# Altium PCB CMTestBoard.PcbDoc (part 1 of 2)
Units mil, origin at the board's own origin, x right, y up, seen from the top; angles counter-clockwise.
Board outline 3790 x 3730 mil, 4 copper layers (Top Layer, Layer 1, Layer 2, Bottom Layer), stack 22.4 mil thick; 114 components, 108 nets, 634 pads, 218 vias.
Unrouted connection lines stored in the file: 45.
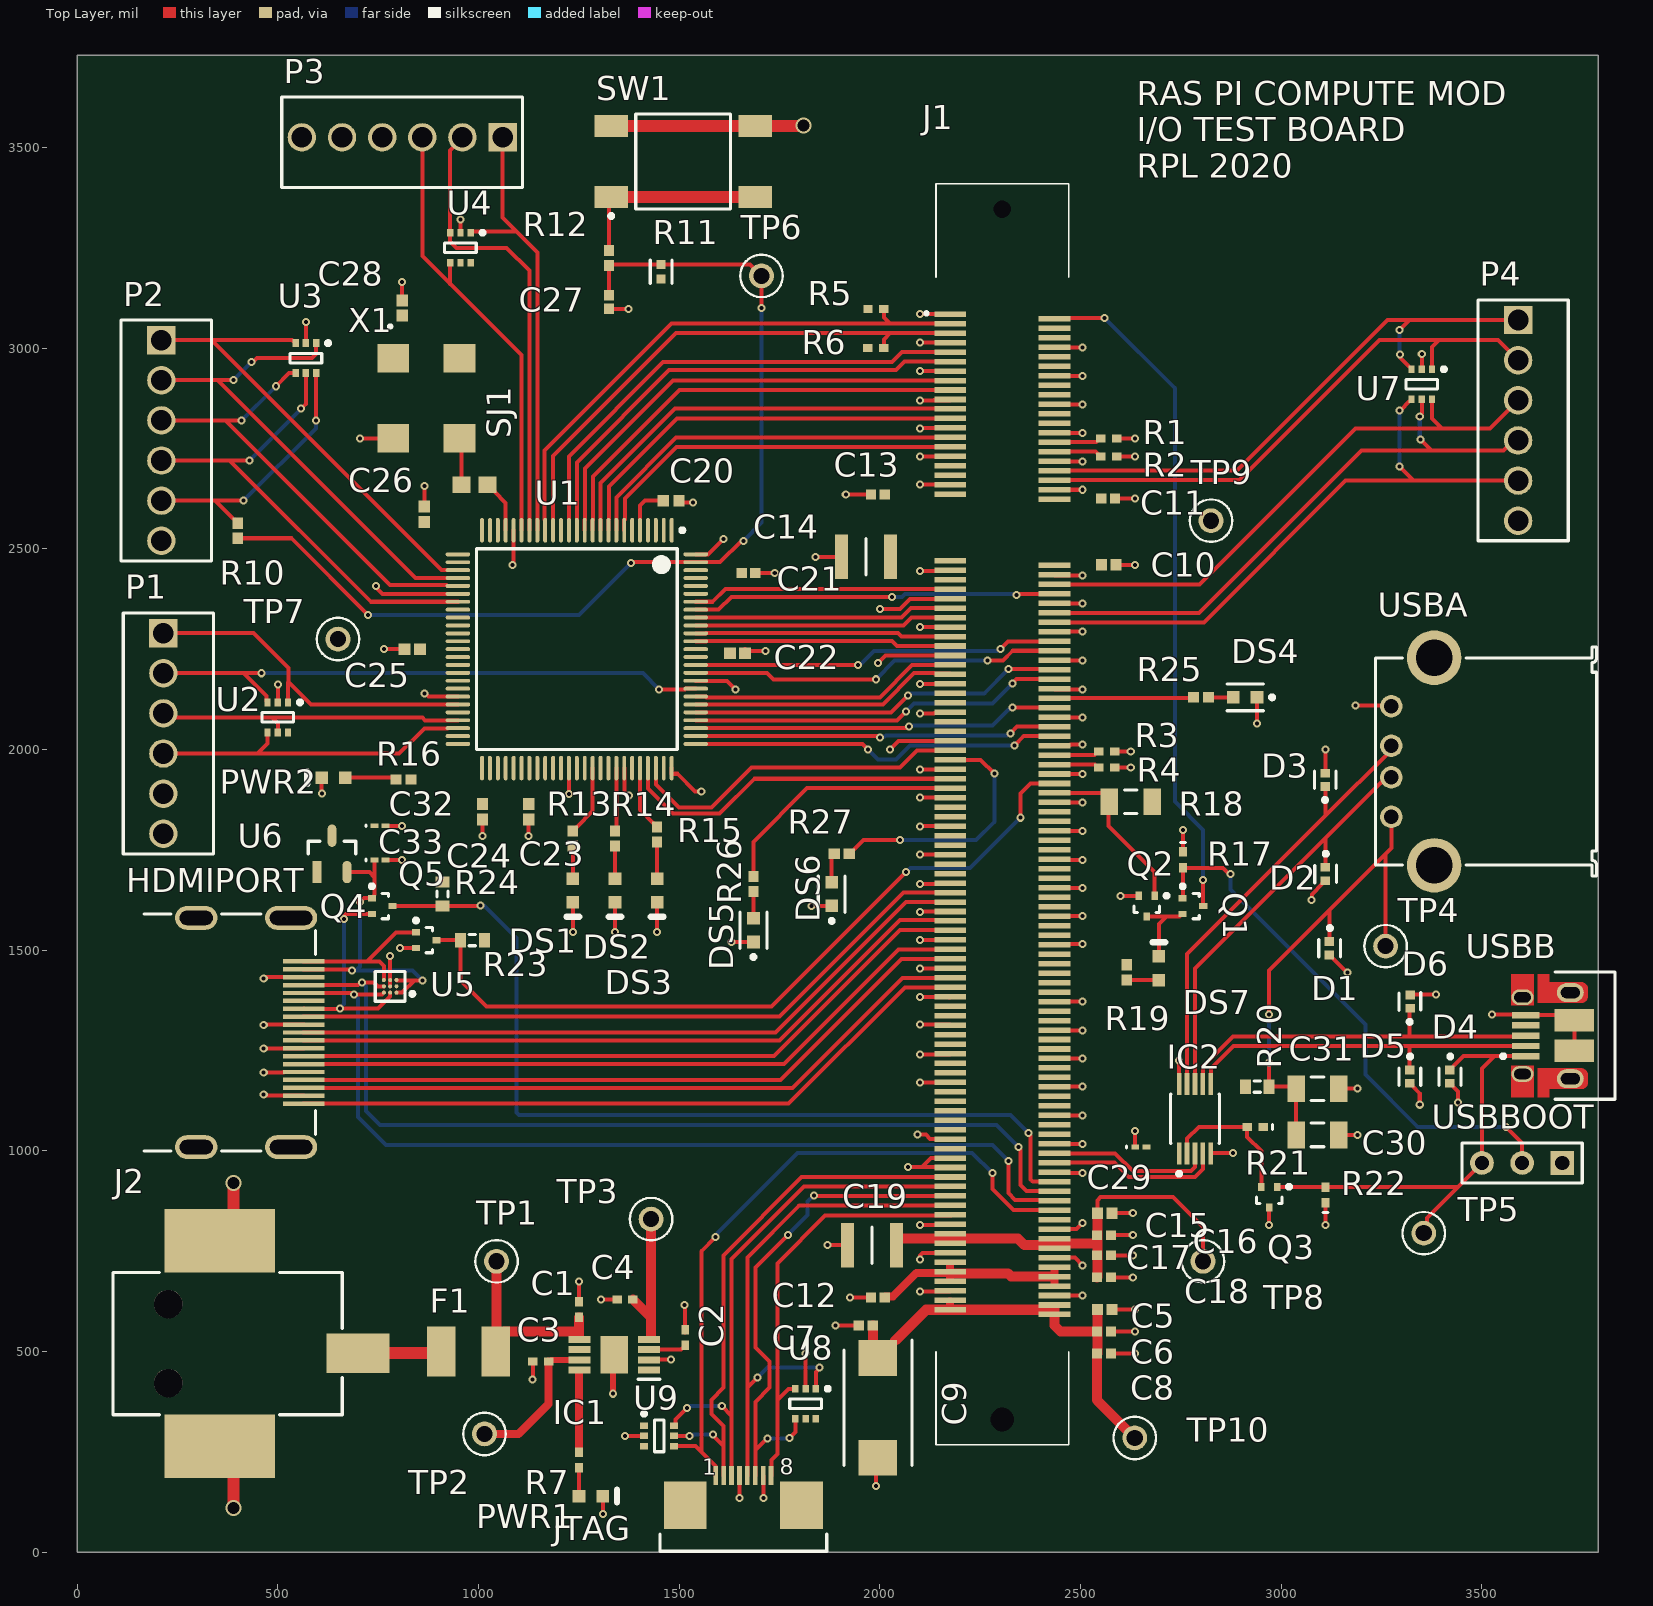
[diagram p0: Top Layer view]
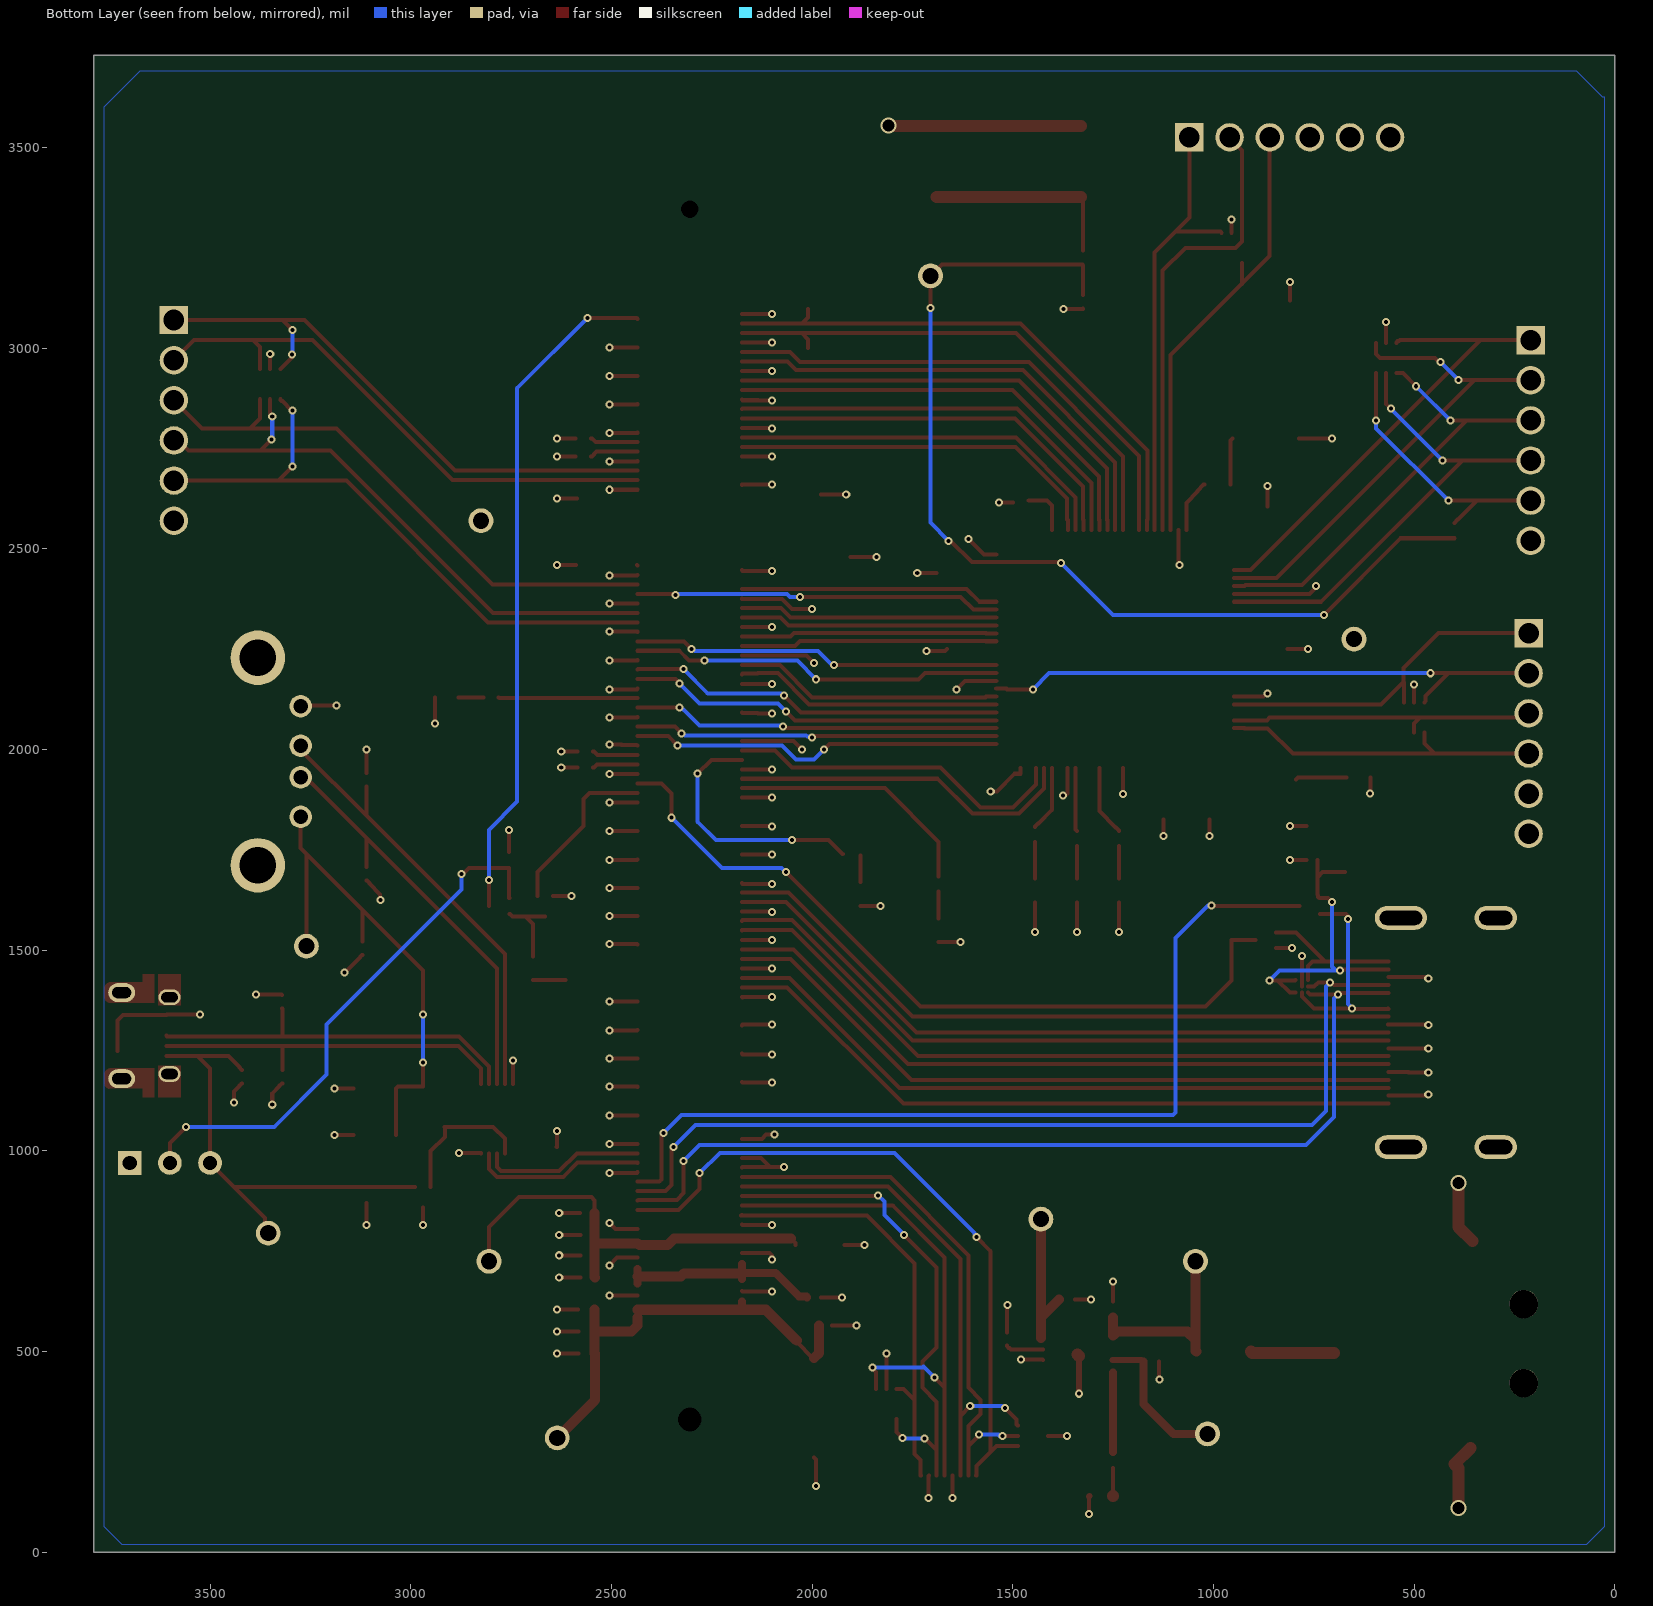
[diagram p1: Bottom Layer view, seen from below]

## Layer stack, top to bottom
Top Solder: solder mask 0.4, Solder Resist, Dk 3.5
Top Layer: signal copper 1.4
Dielectric 2: prepreg 2.8, PP-006, Dk 4.1
Layer 1: signal copper 0.7
Dielectric 1: dielectric 12.6, FR-4, Dk 4.8
Layer 2: signal copper 0.7
Dielectric 3: prepreg 2.8, PP-006, Dk 4.1
Bottom Layer: signal copper 1.4
Bottom Solder: solder mask 0.4, Solder Resist, Dk 3.5

## Board outline
0,0 3790,0 3790,3730 0,3730

## Design rules (kind name [scope] priority, off if disabled: settings)
Clearance [All] p1: gap=10 ignorepadtopadclearanceinfootprint=FALSE except(0: Arc-Hole Track-Hole SMDPad-Hole THPad-Hole Via-Hole Fill-Hole Poly-Hole Region-Hole Text-Hole; 1: SMDPad-SMDPad; 5: Arc-Arc Arc-Track Arc-SMDPad Arc-Via Track-Track Track-SMDPad Track-Via SMDPad-Via)
PolygonConnect [All] p1: connectstyle=Relief reliefconductorwidth=10 reliefentries=4 polygonreliefangle="90 Angle" airgapwidth=10
RoutingVias [All] p1: holewidth=10 width=20 viastyle="Through Hole" minholewidth=5 minwidth=20 maxholewidth=28 maxwidth=50
SolderMaskExpansion [All] p1: expansion=4 istentingtop=FALSE
Width [All] p1: maxlimit=80 minlimit=10 preferedwidth=10
30 further rules are at their usual default settings.

## Classes and differential pairs
net class TC[1..5]: TC1 TC2 TC3 TC4 TC5
component class U_Peripherals: C29 C30 C31 C32 C33 D1 D2 D3 D4 D5 D6 DS7 HDMIPORT IC2 JTAG Q1 Q2 Q3 Q4 Q5 R17 R18 R19 R20 R21 R22 R23 R24 TP4 TP5 U5 U6 USBA USBB USBBOOT
net class TOG[1..10]: TOG1 TOG2 TOG3 TOG4 TOG5 TOG6 TOG7 TOG8 TOG9 TOG10
component class U_XC95144XL: C20 C21 C22 C23 C24 C25 C26 C27 C28 DS1 DS2 DS3 P1 P2 P3 PWR2 R10 R11 R12 R13 R14 R15 R16 SJ1 SW1 TP6 TP7 U1 U2 U3 U4 X1
component class U_CMPower: C1 C2 C3 C4 C5 C6 C7 C8 C9 C10 C11 C12 C13 C14 C15 C16 C17 C18 C19 F1 IC1 J2 TP1 TP2 TP3
component class U_200PinConnector: DS4 DS5 DS6 J1 P4 PWR1 R1 R2 R3 R4 R5 R6 R7 R25 R26 R27 TP8 TP9 TP10 U7 U8 U9

## Components (designator, comment, footprint, x,y, rotation, side; value= is the part's Value field where it differs from the comment)
C1 "C1005X5R0J225M050BC" 0402 1250,605 r270 top value=2.2uF
C2 "VJ0402Y104KXXCW1BC" 0402 1515,535 r270 top value=100nF
C3 "C1005X5R0J225M050BC" 0402 1155,475 r0 top value=2.2uF
C4 "C1005X5R0J225M050BC" 0402 1365,630 r0 top value=2.2uF
C5 "C0402C150J4GACTU" CAPC1005X90N 2560,605 r180 top value=15pF
C6 "C0402C560K5RACTU" CAPC1005X55N 2558.43,550 r0 top value=56pF
C7 "C0402C103K8RACTU" CAPC1005X55N 1965,565 r180 top value=10nF
C8 "C0402C104Z4VAC7867" CAPC1005X55N 2558.43,495 r0 top value=100nF
C9 "6TPC330MA" CAPPM7343X200N 1995,360 r270 top value=330uF
C10 "C0402C150J4GACTU" CAPC1005X90N 2570.2,2460 r180 top value=15pF
C11 "C0402C560K5RACTU" CAPC1005X55N 2568.62,2625 r0 top value=56pF
C12 "C0402C103K8RACTU" CAPC1005X55N 1995,635 r180 top value=10nF
C13 "C0402C104Z4VAC7867" CAPC1005X55N 1995,2635 r180 top value=100nF
C14 "GRM32ER60G337ME05L" CAPC3225X280N 1965,2480 r180 top value=330uF
C15 "C0402C150J4GACTU" CAPC1005X90N 2560,845 r180 top value=15pF
C16 "C0402C560K5RACTU" CAPC1005X55N 2558.43,790 r0 top value=56pF
C17 "C0402C103K8RACTU" CAPC1005X55N 2558.43,740 r0 top value=10nF
C18 "C0402C104Z4VAC7867" CAPC1005X55N 2558.43,685 r0 top value=100nF
C19 "GRM32ER60G337ME05L" CAPC3225X280N 1980,765 r180 top value=330uF
C20 "2.2uF 0402" CAPC0402(1005)60_M 1480,2620 r180 top value=2.2uF
C21 "0.01uF 0402" CAPC1005X55X30NL05T10 1673.07,2440 r180 top
C22 "0.1 uF 0402" CAPC1005X55X30ML05T10 1645,2240 r180 top
C23 "0.1 uF 0402" CAPC1005X55X30ML05T10 1125,1845 r90 top
C24 "0.1 uF 0402" CAPC1005X55X30ML05T10 1010,1845 r90 top
C25 "0.1 uF 0402" CAPC1005X55X30ML05T10 835,2250 r0 top
C26 "0.1 uF 0402" CAPC1005X55X30ML05T10 865,2586.1 r270 top
C27 "0.01uF 0402" CAPC1005X55X30NL05T10 1325,3115 r90 top
C28 "0.1 uF 0402" CAPC1005X55X30ML05T10 810,3100 r270 top
C29 "100nF" 0603 2650,1010 r0 top
C30 "47uF" C1206 3090,1040 r180 top
C31 "47uF" C1206 3090,1155 r180 top
C32 "100nF" 0603 755,1810 r0 top
C33 "100nF" 0603 755,1725 r0 top
D1 "SP3030-01ETG" FP-SP3030-MFG 3120,1505 r270 top value=0.5pF
D2 "SP3030-01ETG" FP-SP3030-MFG 3110,1690 r270 top value=0.5pF
D3 "SP3030-01ETG" FP-SP3030-MFG 3110,1924.49 r90 top value=0.5pF
D4 "SP3030-01ETG" FP-SP3030-MFG 3420,1185 r270 top value=0.5pF
D5 "SP3030-01ETG" FP-SP3030-MFG 3320,1185 r270 top value=0.5pF
D6 "SP3030-01ETG" FP-SP3030-MFG 3320.87,1371.75 r90 top value=0.5pF
DS1 "HSMG-C190" AVAG-HSMX-C190_V 1235,1648.7 r270 top
DS2 "HSMG-C190" AVAG-HSMX-C190_V 1340,1648.7 r270 top
DS3 "HSMG-C190" AVAG-HSMX-C190_V 1445,1648.7 r270 top
DS4 "LTST-C190KFKT" FP-LTST-C190KFKT-MFG 2910,2130 r180 top
DS5 "LTST-C190KFKT" FP-LTST-C190KFKT-MFG 1685,1550 r90 top
DS6 "LTST-C190KFKT" FP-LTST-C190KFKT-MFG 1880,1640 r90 top
DS7 "HSMY-C190" AVAG-HSMX-C190_V 2695,1455 r90 top
F1 "1812L150ZR" LFUS-FUSE1812-71_V 975,500 r0 top
HDMIPORT "685119134923" 685119134923 355,1295 r270 top
IC1 "MIC5357-SGYMME" SOP65P490X104-9N 1338.39,492.2 r180 top
IC2 "FSUSB42MUX" FP-846AP-MFG 2785,1080 r90 top
J1 "2040910-1" 20409101 2305.08,1838.54 r270 top
J2 "694106105102" 694106105102 375,520 r270 top
JTAG "68710814522" 68710814522 1660,90 r0 top
P1 "640456-6" TECO-640456-6_V 215,2290 r270 top
P2 "640456-6" TECO-640456-6_V 210,3020 r270 top
P3 "640456-6" TECO-640456-6_V 1060,3525 r180 top
P4 "640456-6" TECO-640456-6_V 3590,3070 r270 top
PWR1 "HSMY-C190" AVAG-HSMX-C190_V 1280,140 r0 top
PWR2 "HSMG-C190" AVAG-HSMX-C190_V 638.7,1930 r180 top
Q1 "DMG1012T-7" DIOD-SOT523-3_V 2780,1610 r0 top
Q2 "DMG1012T-7" DIOD-SOT523-3_V 2665,1610 r270 top
Q3 "DMG1012T-7" DIOD-SOT523-3_V 2970,885 r270 top
Q4 "DMG1012T-7" DIOD-SOT523-3_V 760,1610 r0 top
Q5 "DMG1012T-7" DIOD-SOT523-3_V 870,1525 r0 top
R1 "CRGP0402F100K" 0402 2570,2775 r0 top value=100k
R2 "CRGP0402F100K" 0402 2570,2730 r0 top value=100k
R3 "CRGP0402F100K" 0402 2565,1995 r0 top value=100k
R4 "CRGP0402F100K" 0402 2565,1955 r0 top value=100k
R5 "0402WGF1801TCE" 0402 1990.07,3097.06 r0 top value=1.8K
R6 "0402WGF1801TCE" 0402 1990,3000 r0 top value=1.8K
R7 "CRG0402J1K0" 0402 1250,230 r270 top value=1K
R10 "0402" RESC1005X40X25ML05T10 400,2545 r270 top
R11 "10k 0402" FP-CRCW0402-e3-IPC_B 1455,3190 r270 top
R12 "0402" RESC1005X40X25ML05T10 1325,3225 r270 top
R13 "0402" RESC1005X40X25ML05T10 1235,1778.7 r90 top
R14 "0402" RESC1005X40X25ML05T10 1340,1778.7 r90 top
R15 "0402" RESC1005X40X25ML05T10 1445,1788.7 r90 top
R16 "0402" RESC1005X40X25ML05T10 813.7,1925 r0 top
R17 "47K" 0402-A 2755,1725 r270 top
R18 "100K" C1206 2625,1870 r0 top
R19 "0402" RESC1005X40X25ML05T10 2615,1445 r90 top
R20 "0R" J1-0603 2940,1160 r180 top
R21 "47k" 0402-A 2935,1060 r180 top
R22 "47k" 0402-A 3110,890 r90 top
R23 "1K" J1-0603 985,1525 r0 top
R24 "1K" J1-0603 910,1640 r90 top
R25 "0402" RESC1005X40X25ML05T10 2800,2130 r180 top
R26 "0402" RESC1005X40X25ML05T10 1685,1665 r90 top
R27 "0402" RESC1005X40X25ML05T10 1905,1740 r0 top
SJ1 "0R 0603" RESC1609X55X30ML10T20 990,2660 r0 top
SW1 "4-1437565-1" TECO-4-1437565-1_V 1510,3465 r90 top
TP1 "5004" FP-5004-MFG 1045,725 r0 top
TP2 "5004" FP-5004-MFG 1015,295 r0 top
TP3 "5004" FP-5004-MFG 1430,830 r0 top
TP4 "5004" FP-5004-MFG 3260,1510 r0 top
TP5 "5004" FP-5004-MFG 3355,795 r0 top
TP6 "5004" FP-5004-MFG 1705,3180 r0 top
TP7 "5004" FP-5004-MFG 650,2275 r0 top
TP8 "5004" FP-5004-MFG 2805,725 r0 top
TP9 "5004" FP-5004-MFG 2825,2570 r0 top
TP10 "5004" FP-5004-MFG 2635,285 r90 top
U1 "XC95144XL-10TQG100C" TQG100_L 1245,2250 r270 top
U2 "SMF05CT1G" ONSC-SC70-6-419B-02_W_V 500,2080 r270 top
U3 "SMF05CT1G" ONSC-SC70-6-419B-02_W_V 570,2975 r270 top
U4 "SMF05CT1G" ONSC-SC70-6-419B-02_W_V 955,3250 r270 top
U5 "ESD5384NCTBG" FP-567CX-01-MFG 780,1410 r180 top
U6 "AP2331W-7" FP-SC59-IPC_B 635,1740 r90 top
U7 "SMF05CT1G" ONSC-SC70-6-419B-02_W_V 3350,2910 r270 top
U8 "SMF05CT1G" ONSC-SC70-6-419B-02_W_V 1815,370 r270 top
U9 "SMF05CT1G" ONSC-SC70-6-419B-02_W_V 1450,290 r0 top
USBA "61400416021" 61400416021 3510,1970 r90 top
USBB "10103594-0001LF" FCI-10103594-0001LF_V 3665.43,1287.11 r90 top
USBBOOT "Header 3" HDR1X3 3700,970 r180 top
X1 "OCETDLJTNF-50MHZ" TXC-L500W700H130-4_V 870,2875 r270 top

## Footprints (in the part's own frame and the unit in brackets; to place one, negate y for a bottom-side part, rotate by r counter-clockwise, add the part's x,y. Pads: shape width x height; smd on the part's side, far side on the other; paste and mask are expansions set on the pad)
0402 [mm] "Chip Capacitor, Body 1.0x0.5mm, IPC High Density"
  rect 0.6x0.5 smd: 1(-0.5,0) 2(0.5,0)
  body extent -0.55,-0.3 0.55,0.3, height 1.3
0402-A [mm] "Chip Inductor, Body 1.0x0.5mm, IPC High Density"
  rect 0.6x0.5 smd: 1(-0.5,0) 2(0.5,0)
  silkscreen extent -1.1,-0.15 -1.1,0.15, body extent -0.55,-0.3 0.55,0.3, height 0.55
0603 [mm] "Chip Inductor, Body 0.6x0.3mm, IPC High Density"
  rect 0.5x0.3 smd: 1(-0.35,0) 2(0.35,0)
  silkscreen extent -0.9,-0.05 -0.9,0.05, body extent -0.33,-0.18 0.33,0.18, height 0.55
20409101 [mm]
  rect 0.35x2 smd: 1(-31.65,-3.3) 2(-31.35,3.3) 3(-31.05,-3.3) 4(-30.75,3.3) 5(-30.45,-3.3) 6(-30.15,3.3) 7(-29.85,-3.3) 8(-29.55,3.3) 9(-29.25,-3.3) 10(-28.95,3.3) 11(-28.65,-3.3) 12(-28.35,3.3) 13(-28.05,-3.3) 14(-27.75,3.3) 15(-27.45,-3.3) 16(-27.15,3.3) 17(-26.85,-3.3) 18(-26.55,3.3) 19(-26.25,-3.3) 20(-25.95,3.3) 21(-25.65,-3.3) 22(-25.35,3.3) 23(-25.05,-3.3) 24(-24.75,3.3) 25(-24.45,-3.3) 26(-24.15,3.3) 27(-23.85,-3.3) 28(-23.55,3.3) 29(-23.25,-3.3) 30(-22.95,3.3) 31(-22.65,-3.3) 32(-22.35,3.3) 33(-22.05,-3.3) 34(-21.75,3.3) 35(-21.45,-3.3) 36(-21.15,3.3) 37(-20.85,-3.3) 38(-20.55,3.3) 39(-20.25,-3.3) 40(-19.95,3.3) 41(-16.05,-3.3) 42(-15.75,3.3) 43(-15.45,-3.3) 44(-15.15,3.3) 45(-14.85,-3.3) 46(-14.55,3.3) 47(-14.25,-3.3) 48(-13.95,3.3) 49(-13.65,-3.3) 50(-13.35,3.3) 51(-13.05,-3.3) 52(-12.75,3.3) 53(-12.45,-3.3) 54(-12.15,3.3) 55(-11.85,-3.3) 56(-11.55,3.3) 57(-11.25,-3.3) 58(-10.95,3.3) 59(-10.65,-3.3) 60(-10.35,3.3) 61(-10.05,-3.3) 62(-9.75,3.3) 63(-9.45,-3.3) 64(-9.15,3.3) 65(-8.85,-3.3) 66(-8.55,3.3) 67(-8.25,-3.3) 68(-7.95,3.3) 69(-7.65,-3.3) 70(-7.35,3.3) 71(-7.05,-3.3) 72(-6.75,3.3) 73(-6.45,-3.3) 74(-6.15,3.3) 75(-5.85,-3.3) 76(-5.55,3.3) 77(-5.25,-3.3) 78(-4.95,3.3) 79(-4.65,-3.3) 80(-4.35,3.3) 81(-4.05,-3.3) 82(-3.75,3.3) 83(-3.45,-3.3) 84(-3.15,3.3) 85(-2.85,-3.3) 86(-2.55,3.3) 87(-2.25,-3.3) 88(-1.95,3.3) 89(-1.65,-3.3) 90(-1.35,3.3) 91(-1.05,-3.3) 92(-0.75,3.3) 93(-0.45,-3.3) 94(-0.15,3.3) 95(0.15,-3.3) 96(0.45,3.3) 97(0.75,-3.3) 98(1.05,3.3) 99(1.35,-3.3) 100(1.65,3.3) 101(1.95,-3.3) 102(2.25,3.3) 103(2.55,-3.3) 104(2.85,3.3) 105(3.15,-3.3) 106(3.45,3.3) 107(3.75,-3.3) 108(4.05,3.3) 109(4.35,-3.3) 110(4.65,3.3) 111(4.95,-3.3) 112(5.25,3.3) 113(5.55,-3.3) 114(5.85,3.3) 115(6.15,-3.3) 116(6.45,3.3) 117(6.75,-3.3) 118(7.05,3.3) 119(7.35,-3.3) 120(7.65,3.3) 121(7.95,-3.3) 122(8.25,3.3) 123(8.55,-3.3) 124(8.85,3.3) 125(9.15,-3.3) 126(9.45,3.3) 127(9.75,-3.3) 128(10.05,3.3) 129(10.35,-3.3) 130(10.65,3.3) 131(10.95,-3.3) 132(11.25,3.3) 133(11.55,-3.3) 134(11.85,3.3) 135(12.15,-3.3) 136(12.45,3.3) 137(12.75,-3.3) 138(13.05,3.3) 139(13.35,-3.3) 140(13.65,3.3) 141(13.95,-3.3) 142(14.25,3.3) 143(14.55,-3.3) 144(14.85,3.3) 145(15.45,3.3) 146(15.15,-3.3) 147(16.05,3.3) 148(15.75,-3.3) 149(16.65,3.3) 150(16.35,-3.3) 151(17.25,3.3) 152(16.95,-3.3) 153(17.85,3.3) 154(17.55,-3.3) 155(18.45,3.3) 156(18.15,-3.3) 157(19.05,3.3) 158(18.75,-3.3) 159(19.65,3.3) 160(19.35,-3.3) 161(20.25,3.3) 162(19.95,-3.3) 163(20.85,3.3) 164(20.55,-3.3) 165(21.45,3.3) 166(21.15,-3.3) 167(22.05,3.3) 168(21.75,-3.3) 169(22.65,3.3) 170(22.35,-3.3) 171(23.25,3.3) 172(22.95,-3.3) 173(23.85,3.3) 174(23.55,-3.3) 175(24.45,3.3) 176(24.15,-3.3) 177(25.05,3.3) 178(24.75,-3.3) 179(25.65,3.3) 180(25.35,-3.3) 181(26.25,3.3) 182(25.95,-3.3) 183(26.85,3.3) 184(26.55,-3.3) 185(27.45,3.3) 186(27.15,-3.3) 187(28.05,3.3) 188(27.75,-3.3) 189(28.65,3.3) 190(28.35,-3.3) 191(29.25,3.3) 192(28.95,-3.3) 193(29.85,3.3) 194(29.55,-3.3) 195(30.45,3.3) 196(30.15,-3.3) 197(31.05,3.3) 198(30.75,-3.3) 199(31.65,3.3) 200(31.35,-3.3)
  round 0.55 hole 1.1 unplated: MH1(-38.3,0)
  round 0.75 hole 1.5 unplated: MH2(38.3,0)
  silkscreen extent -39.9,-4.9 39.9,4.2, body extent -39.9,-4.2 39.9,4.2, height 1.8
61400416021 [mm] "USB 2.0 Type A Horizontal"
  round 1.42 hole 0.92: 1(-3.5,5.99) 2(-1,5.99) 3(1,5.99) 4(3.5,5.99)
  round 3.45 hole 2.3: Shell(-6.57,3.28) Shell(6.57,3.28)
  silkscreen extent -7.25,-7 7.25,7, body extent -8,-7 8,7, height 7.63
68710814522 [mm] "ZIF Connectors, Horizontal, Bottom Contact, pitch 0.5mm, 8p"
  rect 0.3x1.2 smd: 1(-1.75,2.56) 2(-1.25,2.56) 3(-0.75,2.56) 4(-0.25,2.56) 5(0.25,2.56) 6(0.75,2.56) 7(1.25,2.56) 8(1.75,2.56)
  rect 2.7x3 smd: MP1(-3.68,0.7) MP2(3.68,0.7)
  silkscreen extent -5.27,-2.22 5.28,-1.12, body extent -5.2,-2.15 5.2,2.95, height 2.1
685119134923 [mm] "HDMI SMT Horizontal"
  rect 0.28x2.6 smd: 1(4.5,5.325) 2(4,5.325) 3(3.5,5.325) 4(3,5.325) 5(2.5,5.325) 6(2,5.325) 7(1.5,5.325) 8(1,5.325) 9(0.5,5.325) 10(0,5.325) 11(-0.5,5.325) 12(-1,5.325) 13(-1.5,5.325) 14(-2,5.325) 15(-2.5,5.325) 16(-3,5.325) 17(-3.5,5.325) 18(-4,5.325) 19(-4.5,5.325)
  oval 1.5x3.3 hole 0.9 slot 2.7 at 90 deg: Shell(-7.25,4.525) Shell(7.25,4.525)
  oval 1.5x2.7 hole 0.9 slot 2.1 at 90 deg: Shell(-7.25,-1.475) Shell(7.25,-1.475)
  silkscreen extent -7.5,-4.78 7.5,6.07, body extent -7.55,-6.07 7.45,6.08, height 6.17
694106105102 [mm] "DC Power Jack Right Angled SMT ?6.4 with pegs"
  rect 2.5x4 smd: 1(0.6,8.25)
  rect 4x7 smd: 2(-6.5,-0.5) 3(6.5,-0.5)
  round 1.8 hole 1.8 unplated: MH1(-2.5,-3.75) MH2(2.5,-3.75)
  silkscreen extent -4.5,-7.25 4.5,7.25, body extent -7.6,-7.25 7.6,9.75, height 11.05
AVAG-HSMX-C190_V [mm] "SMD, 2-Leads, Body 1.6x0.8mm, Height 0.9mm"
  rect 0.8x0.8 smd: 1(-0.75,0) 2(0.75,0)
  silkscreen extent 1.65,-0.4 1.65,0.4, body extent -0.8,-0.4 0.8,0.4, height 0.9
C1206 [mm] "Chip Capacitor, Body 3.2x1.6mm, IPC High Density"
  rect 1.1x1.7 smd: 1(-1.35,0) 2(1.35,0)
  silkscreen extent -0.4,-0.75 0.4,0.75, body extent -1.7,-0.9 1.7,0.9, height 1.3
CAPC0402(1005)60_M [mm] "Chip Capacitor, Body 1.0x0.5mm, Height 0.6mm, IPC Low Density"
  rect 0.72x0.72 smd: 1(-0.5,0) 2(0.5,0)
  body extent -0.55,-0.3 0.55,0.3, height 0.6
CAPC1005X55N [mm]
  rect 0.65x0.62 smd: 1(-0.44,0) 2(0.44,0)
  body extent -0.5,-0.25 0.5,0.25, height 0.55
CAPC1005X55X30ML05T10 [mm] "Chip Capacitor, 2-Leads, Body 1.00x0.50mm, IPC Low Density"
  rect 0.76x0.72 smd: 1(-0.48,0) 2(0.48,0)
  body extent -0.53,-0.28 0.53,0.27, height 0.55
CAPC1005X55X30NL05T10 [mm] "Chip Capacitor, 2-Leads, Body 1.00x0.50mm, IPC Medium Density"
  rect 0.66x0.62 smd: 1(-0.43,0) 2(0.43,0)
  body extent -0.53,-0.28 0.53,0.27, height 0.55
CAPC1005X90N [mm]
  rect 0.69x0.72 smd: 1(-0.46,0) 2(0.46,0)
  body extent -0.5,-0.25 0.5,0.25, height 0.9
CAPC3225X280N [mm]
  rect 0.82x2.82 smd: 1(-1.55,0) 2(1.55,0)
  silkscreen extent 0,-1.15 0,1.15, body extent -1.6,-1.25 1.6,1.25, height 2.8
CAPPM7343X200N [mm]
  rect 2.25x2.45 smd: 1(-3.15,0) 2(3.15,0)
  silkscreen extent -4.28,-2.15 3.65,2.15, body extent -3.65,-2.15 3.65,2.15, height 2
DIOD-SOT523-3_V [mm] "SOT523, 3-Leads, Body 1.6x0.8mm, Pitch 0.50mm"
  rect 0.51x0.4 smd: 1(-0.65,0.5) 2(-0.65,-0.5) 3(0.65,0)
  silkscreen extent -0.77,-0.8 0.4,1.37, body extent -0.4,-0.8 0.4,0.8, height 0.86
FCI-10103594-0001LF_V [mm] "SMD, 5-Leads, Body 8.04x5.62mm, Pitch 0.65 mm"
  rect 0.4x1.75 smd: 1(-1.3,1.435) 2(-0.65,1.435) 3(0,1.435) 4(0.65,1.435) 5(1.3,1.435)
  oval 1x1.4 hole 0.65 slot 1.05 at 90 deg: 6(-2.425,1.64) 7(2.425,1.64)
  oval 1.2x1.7 hole 0.7 slot 1.2 at 90 deg: 8(2.725,-1.39) 9(-2.725,-1.39)
  rect 1.425x2.5 smd: 10(-0.962,-1.64) 11(0.962,-1.64)
  Top Layer region: 3.9,2.37 1.9,2.37 1.9,0.91 3.9,0.91
  Top Layer region: -3.9,0.91 -1.9,0.91 -1.9,2.37 -3.9,2.37
  Top Layer region: 3.375,-0.04 3.375,-2.09 3.373,-2.129 3.369,-2.167 3.365,-2.185 3.359,-2.203 3.348,-2.239 3.329,-2.277 3.308,-2.312 3.284,-2.344 3.258,-2.374 3.227,-2.401 3.194,-2.426 3.158,-2.446 3.121,-2.464 3.08,-2.477 3.049,-2.483 3.012,-2.488 2.975,-2.49 2.475,-2.49 2.432,-2.488 2.391,-2.481 2.351,-2.471 2.312,-2.456 2.28,-2.439 2.249,-2.421 2.217,-2.396 2.19,-2.37 2.164,-2.342 2.143,-2.312 2.121,-2.277 2.105,-2.241 2.093,-2.209 2.088,-2.192 2.084,-2.175 2.08,-2.155 2.076,-2.134 2.075,-2.112 2.075,-2.09 2.075,-0.04 2.075,0.66 3.9,0.66 3.9,-0.04
  Top Layer region: -3.375,-0.04 -3.375,-2.09 -3.373,-2.129 -3.369,-2.167 -3.365,-2.185 -3.359,-2.203 -3.348,-2.239 -3.329,-2.277 -3.308,-2.312 -3.284,-2.344 -3.258,-2.374 -3.227,-2.401 -3.194,-2.426 -3.158,-2.446 -3.121,-2.464 -3.08,-2.477 -3.049,-2.483 -3.012,-2.488 -2.975,-2.49 -2.475,-2.49 -2.432,-2.488 -2.391,-2.482 -2.351,-2.471 -2.312,-2.456 -2.28,-2.439 -2.249,-2.421 -2.217,-2.397 -2.19,-2.37 -2.164,-2.342 -2.143,-2.312 -2.121,-2.277 -2.105,-2.241 -2.093,-2.209 -2.088,-2.192 -2.084,-2.175 -2.08,-2.155 -2.076,-2.134 -2.075,-2.112 -2.075,-2.09 -2.075,-0.04 -2.075,0.66 -3.9,0.66 -3.9,-0.04
  silkscreen extent -4.02,-4.21 4.02,2.98, body extent -4.02,-4.15 4.02,1.88, height 2.9
FP-567CX-01-MFG [mm]
  round 0.25 smd paste+0 mask+0: A1(-0.4,0.4) A2(0,0.4) A3(0.4,0.4) B1(-0.4,0) B2(0,0) B3(0.4,0) C1(-0.4,-0.4) C2(0,-0.4) C3(0.4,-0.4)
  silkscreen extent -1.53,-0.94 0.94,0.94, body extent -1.09,-1.09 1.09,1.1, height 0.25
FP-846AP-MFG [mm]
  rect 1.4x0.3 smd paste+0 mask+0: 1(-2.2,1) 2(-2.2,0.5) 3(-2.2,0) 4(-2.2,-0.5) 5(-2.2,-1) 6(2.2,-1) 7(2.2,-0.5) 8(2.2,0) 9(2.2,0.5) 10(2.2,1)
  silkscreen extent -3.6,-1.55 1.55,1.55, body extent -3,-1.65 3,1.65, height 0.25
FP-5004-MFG [mm]
  round 1.57 hole 1.02 paste-1000 mask+0: 1(0,0)
  silkscreen extent -1.35,-1.34 1.35,1.34, body extent -1.45,-1.45 1.45,1.45, height 0.25
FP-CRCW0402-e3-IPC_B [mil]
  rect 22.37x22.54 smd paste+0 mask+0: 1(-17.8,0) 2(17.8,0)
  silkscreen extent -29,-27 29,27
FP-LTST-C190KFKT-MFG [mm]
  rect 0.8x0.8 smd paste+0 mask+0: 1(-0.75,0) 2(0.75,0)
  silkscreen extent -1.83,-0.85 1.15,0.85, body extent -1.25,-0.55 1.25,0.55, height 0.25
FP-SC59-IPC_B [mm]
  rect 1.407x0.576 smd paste+0 mask+0: 1(-1.151,0.95)
  rrect100% 1.407x0.576 smd paste+0 mask+0: 2(-1.151,-0.95) 3(1.151,0)
  silkscreen extent 0,-1.5 0.8,1.5, body extent -2.1,-1.75 2.1,1.75, height 0.25
FP-SP3030-MFG [mm]
  rect 0.55x0.6 smd paste+0 mask+0: 1(-0.425,0) 2(0.425,0)
  silkscreen extent -1.4,-0.68 0.56,0.7, body extent -0.8,-0.45 0.8,0.45, height 0.25
HDR1X3 [mm] "Connector; Header; 3 Position"
  rect 1.5x1.5 hole 0.9: 1(0,0)
  round 1.5 hole 0.9: 2(2.54,0) 3(5.08,0)
  silkscreen extent -1.27,-1.27 6.35,1.27
J1-0603 [mm] "Chip Resistor, Body 1.6x0.8mm, IPC High Density"
  rect 0.7x0.9 smd: 1(-0.75,0) 2(0.75,0)
  silkscreen extent -0.2,-0.35 0.2,0.35, body extent -0.85,-0.48 0.85,0.48, height 0.9
LFUS-FUSE1812-71_V [mm] "Chip Fuse, Body 4.73x3.41mm, Height 0.71mm"
  rect 1.78x3.15 smd: 1(-1.725,0) 2(1.725,0)
  body extent -1.73,-1.57 1.73,1.57, height 0.71
ONSC-SC70-6-419B-02_W_V [mm] "SOT23, 6-Leads, Body 2x1.25mm, Pitch 0.65mm"
  rect 0.5x0.4 smd: 1(-0.95,0.65) 2(-0.95,0) 3(-0.95,-0.65) 4(0.95,-0.65) 5(0.95,0) 6(0.95,0.65)
  silkscreen extent -1.07,-1 0.3,1.53, body extent -0.63,-1 0.63,1, height 1.1
RESC1005X40X25ML05T10 [mm] "Chip Resistor, 2-Leads, Body 1.00x0.50mm, IPC Low Density"
  rect 0.7x0.65 smd: 1(-0.475,0) 2(0.475,0)
  body extent -0.53,-0.27 0.53,0.28, height 0.4
RESC1609X55X30ML10T20 [mm] "Chip Resistor, 2-Leads, Body 1.60x0.85mm, IPC Low Density"
  rect 1.15x1.05 smd: 1(-0.825,0) 2(0.825,0)
  body extent -0.85,-0.48 0.85,0.48, height 0.55
SOP65P490X104-9N [mm]
  rect 1.4x0.45 smd: 1(-2.2,0.975) 2(-2.2,0.325) 3(-2.2,-0.325) 4(-2.2,-0.975) 5(2.2,-0.975) 6(2.2,-0.325) 7(2.2,0.325) 8(2.2,0.975)
  rect 1.73x2.36 smd: 9(0,0)
  silkscreen extent -2.9,1.55 -1.5,1.55, body extent -2.45,-1.5 2.45,1.5, height 1.04
TECO-4-1437565-1_V [mil] "SMD, 4-Leads, Body 6x6mm, Pitch 9.1mm"
  rect 55x83 smd: 1(-88.5,179.5) 2(-88.5,-179.5) 3(88.5,179.5) 4(88.5,-179.5)
  silkscreen extent -141,-118 118,184, body extent -118,-197 118,197, height 200
TECO-640456-6_V [mm] "THD, 6-Leads, Body 15.24x5.72mm, Pitch 2.54mm"
  rect 1.8x1.8 hole 1.3: 1(0,0)
  round 1.8 hole 1.3: 2(2.54,0) 3(5.08,0) 4(7.62,0) 5(10.16,0) 6(12.7,0)
  silkscreen extent -1.27,-2.54 13.97,3.18, body extent -1.27,-2.54 13.97,3.18, height 10.03
TQG100_L [mm] "Thin QFP, 100-Leads, Body 14x14mm, Pitch 0.5mm, IPC High Density"
  oval 1.55x0.25 smd: 1(-7.525,6) 2(-7.525,5.5) 3(-7.525,5) 4(-7.525,4.5) 5(-7.525,4) 6(-7.525,3.5) 7(-7.525,3) 8(-7.525,2.5) 9(-7.525,2) 10(-7.525,1.5) 11(-7.525,1) 12(-7.525,0.5) 13(-7.525,0) 14(-7.525,-0.5) 15(-7.525,-1) 16(-7.525,-1.5) 17(-7.525,-2) 18(-7.525,-2.5) 19(-7.525,-3) 20(-7.525,-3.5) 21(-7.525,-4) 22(-7.525,-4.5) 23(-7.525,-5) 24(-7.525,-5.5) 25(-7.525,-6) 51(7.525,-6) 52(7.525,-5.5) 53(7.525,-5) 54(7.525,-4.5) 55(7.525,-4) 56(7.525,-3.5) 57(7.525,-3) 58(7.525,-2.5) 59(7.525,-2) 60(7.525,-1.5) 61(7.525,-1) 62(7.525,-0.5) 63(7.525,0) 64(7.525,0.5) 65(7.525,1) 66(7.525,1.5) 67(7.525,2) 68(7.525,2.5) 69(7.525,3) 70(7.525,3.5) 71(7.525,4) 72(7.525,4.5) 73(7.525,5) 74(7.525,5.5) 75(7.525,6)
  oval 0.25x1.55 smd: 26(-6,-7.525) 27(-5.5,-7.525) 28(-5,-7.525) 29(-4.5,-7.525) 30(-4,-7.525) 31(-3.5,-7.525) 32(-3,-7.525) 33(-2.5,-7.525) 34(-2,-7.525) 35(-1.5,-7.525) 36(-1,-7.525) 37(-0.5,-7.525) 38(0,-7.525) 39(0.5,-7.525) 40(1,-7.525) 41(1.5,-7.525) 42(2,-7.525) 43(2.5,-7.525) 44(3,-7.525) 45(3.5,-7.525) 46(4,-7.525) 47(4.5,-7.525) 48(5,-7.525) 49(5.5,-7.525) 50(6,-7.525) 76(6,7.525) 77(5.5,7.525) 78(5,7.525) 79(4.5,7.525) 80(4,7.525) 81(3.5,7.525) 82(3,7.525) 83(2.5,7.525) 84(2,7.525) 85(1.5,7.525) 86(1,7.525) 87(0.5,7.525) 88(0,7.525) 89(-0.5,7.525) 90(-1,7.525) 91(-1.5,7.525) 92(-2,7.525) 93(-2.5,7.525) 94(-3,7.525) 95(-3.5,7.525) 96(-4,7.525) 97(-4.5,7.525) 98(-5,7.525) 99(-5.5,7.525) 100(-6,7.525)
  silkscreen extent -7.65,-6.35 6.35,6.8, body extent -7,-7 7,7, height 1.6
TXC-L500W700H130-4_V [mm] "Oscillator, Body 5.0x7.0mm, Height 1.3mm"
  rect 1.8x2 smd: 1(-2.54,-2.1) 2(2.54,-2.1) 3(2.54,2.1) 4(-2.54,2.1)
  silkscreen extent -4.64,-2.39 -4.45,-2.19, body extent -3.5,-2.5 3.5,2.5, height 1.3

## Part data
C1 C2 C3 C4: library part Cap, "Capacitor", LatestRevisionDate=17-Jul-2002, LatestRevisionNote="Re-released for DXP Platform.", PackageDescription="Radial Cap, Thru-Hole; 2 Leads; 0.3 in Pin Spacing", PackageReference=RAD-0.3, Published=8-Jun-2000, Publisher="Altium Limited"
C5 C10 C15: "Capacitor", Manufacturer_Name=Kemet, Mouser Part Number=80-C0402C150J4G, Arrow Part Number=C0402C150J4GACTU, Arrow Price/Stock=https://www.arrow.com/en/products/c0402c150j4gactu/kemet-corporation, Datasheet Link=https://content.kemet.com/datasheets/KEM_C1002_X7R_SMD.pdf, Height=0.55mm, Manufacturer_Part_Number=C0402C150J4GACTU, Mouser Price/Stock=https://www.mouser.com/Search/Refine.aspx?Keyword=80-C0402C150J4G
C6 C11 C16: "Capacitor", Manufacturer_Name=Kemet, Mouser Part Number=80-C0402C560K5RACTU, Arrow Part Number=C0402C560K5RACTU, Datasheet Link=https://content.kemet.com/datasheets/KEM_C1002_X7R_SMD.pdf, Height=0.55mm, Manufacturer_Part_Number=C0402C560K5RACTU, Mouser Price/Stock=https://www.mouser.co.uk/ProductDetail/KEMET/C0402C560K5RACTU?qs=gt1LBUVyoHmQZW5v3ySgNQ%3D%3D
C7 C12 C17: "Capacitor", Manufacturer_Name=Kemet, Mouser Part Number=80-C0402C103K8R, Arrow Part Number=C0402C103K8RACTU, Arrow Price/Stock=https://www.arrow.com/en/products/c0402c103k8ractu/kemet-corporation, Datasheet Link=https://content.kemet.com/datasheets/KEM_C1002_X7R_SMD.pdf, Height=0.55mm, Manufacturer_Part_Number=C0402C103K8RACTU, Mouser Price/Stock=https://www.mouser.co.uk/ProductDetail/KEMET/C0402C103K8RACTU?qs=JAINH4q0Y0HkMNTUebnT7w%3D%3D
C8 C13 C18: library part C0402C560K5RACTU, "Capacitor", Manufacturer_Name=Kemet, Mouser Part Number=80-C0402C560K5RACTU, Arrow Part Number=C0402C560K5RACTU, Datasheet Link=https://content.kemet.com/datasheets/KEM_C1002_X7R_SMD.pdf, Height=0.55mm, Manufacturer_Part_Number=C0402C560K5RACTU, Mouser Price/Stock=https://www.mouser.co.uk/ProductDetail/KEMET/C0402C560K5RACTU?qs=gt1LBUVyoHmQZW5v3ySgNQ%3D%3D
C9: "Capacitor Polarised", Manufacturer_Name=Panasonic, Mouser Part Number=667-6TPC330MA, Arrow Part Number=6TPC330MA, Arrow Price/Stock=https://www.arrow.com/en/products/6tpc330ma/panasonic, Datasheet Link=https://industrial.panasonic.com/cdbs/www-data/pdf/AAA8000/AAA8000C68.pdf, Height=2mm, Manufacturer_Part_Number=6TPC330MA, Mouser Price/Stock=https://www.mouser.co.uk/ProductDetail/Panasonic/6TPC330MA?qs=OE1iw1LrrPEq6z1np%252BZymw%3D%3D
C14 C19: "Capacitor", Manufacturer_Name="Murata Electronics", Mouser Part Number=81-GRM32ER60G337ME5L, Arrow Part Number=GRM32ER60G337ME05L, Arrow Price/Stock=https://www.arrow.com/en/products/grm32er60g337me05l/murata-manufacturing, Datasheet Link=https://componentsearchengine.com/Datasheets/2/GRM32ER60G337ME05L.pdf, Height=2.8mm, Manufacturer_Part_Number=GRM32ER60G337ME05L, Mouser Price/Stock=https://www.mouser.co.uk/ProductDetail/Murata-Electronics/GRM32ER60G337ME05L?qs=MzgNgRTiRUU9wX46aOSi8Q%3D%3D
C20: library part CMP-1034-02125-1, "CAP 2.2uF 6.3V ±10% 0402 (1005 Metric) Thickness 0.6mm SMD", Case-EIA=0402, Case-Metric=1005, Rated Voltage="6.3 V", Tolerance=Â±10%, Max Thickness="0.6 mm", Technology=SMT
C21 C27: library part CMP-2008-03072-1, Manufacturer=Kemet, Part Number=C0402C103K4RACTU
C22 C23 C24 C25 C26 C28: library part CMP-2008-03080-1, Manufacturer=Kemet, Part Number=C0402C104J4RACTU
C29 C32 C33: library part Cap, "Capacitor", LCSC Part #=C14663, LatestRevisionDate=17-Jul-2002, LatestRevisionNote="Re-released for DXP Platform.", PackageDescription="Radial Cap, Thru-Hole; 2 Leads; 0.3 in Pin Spacing", PackageReference=RAD-0.3, Published=8-Jun-2000, Publisher="Altium Limited"
C30 C31: library part Cap, "Capacitor", LCSC Part #=C96123, LatestRevisionDate=17-Jul-2002, LatestRevisionNote="Re-released for DXP Platform.", PackageDescription="Radial Cap, Thru-Hole; 2 Leads; 0.3 in Pin Spacing", PackageReference=RAD-0.3, Published=8-Jun-2000, Publisher="Altium Limited"
D1 D2 D3 D4 D5 D6: library part CMP-08607-000070-1, "TVS DIODE 5V 10V SOD882", Capacitance=0.5pF, Clamping Voltage=10V, Manufacturer=Littelfuse, Max Junction Temp=+150°C, Package=SP3030, Peak Pulse Current=3A, Reverse Standoff Voltage=5V, Temperature="-40°C to +125°C", Temperature Range High=+125°C, Temperature Range Low=-40°C, Automotive=Yes, Automotive Grade="Grade 1", Category=Diode, ComponentLink2Description=Datasheet, ComponentLink2URL=https://www.littelfuse.com/~/media/electronics/datasheets/tvs_diode_arrays/littelfuse_tvs_diode_array_sp3030_datasheet.pdf.pdf, Device Class L1="Circuit Protection", Device Class L2="TVS Diodes", Device Class L3=unset, Digikey Description="TVS DIODE 5V 10V SOD882", Direction=Unidirectional, Height=0.6mm, Lead Free=Yes, Manufacturer Part Number=SP3030-01ETG, Mouser Description="TVS Diodes / ESD Suppressors 5V 1uA 22kV UNIDIRECTIONAL", Number of Channels=1, Octopart=https://octopart.com/sp3030-01etg-littelfuse-29687287, RoHS=TRUE
DS1 DS2 DS3 PWR2: library part CMP-1744-00002-1, "Chip LED, Green, 2.2 V, -40 to 85 degC, 2-Pin SMD, RoHS, Tape and Reel", Case\Package=SOIC, Clock Frequency="100 KHz", Frequency="400 KHz", Max Operating Temperature="85 degC", Max Supply Voltage="5.5 V", Min Operating Temperature="-40 degC", Min Supply Voltage="1.7 V", Nominal Supply Current="2 mA", Package Quantity=3000, Access Time="3500 ns", ComponentLink1Description="Manufacturer URL", ComponentLink1URL=http://www.avagotech.com/, ComponentLink2Description=Datasheet, ComponentLink2URL=http://docs.avagotech.com/docs/AV02-0551EN, ComponentLink3Description="Package Specification", ComponentLink3URL=http://www.fairchildsemi.com/dwg/MA/MA03D.pdf, DatasheetVersion=Mar-12, Density="32 kb", Height="1.5 mm", Interface=Serial, Length="5 mm", Max Clock Frequency="100 KHz", Mount="Surface Mount", PackageDescription="2-Pin Surface Mount Device, Body 1.6 x 0.8 mm, Height 0.9 mm", PackageReference=HSMX-C190, Packaging="Tape and Reel", Pins=8, Radiation Hardening=No, REACH SVHC="No SVHC", RoHSCompliant=true, Width="4 mm"
DS4 DS5 DS6: library part CMP-1674-00008-2, "LED ORANGE CLEAR CHIP SMD", Case Code (Imperial)=0603, Case Code (Metric)=1608, Color=Orange, Forward Current=30mA, Forward Voltage=2V, Lens Color=Colorless, Max Operating Temperature=85°C, Min Operating Temperature=-55°C, Package Quantity=1, Power Dissipation=75mW, Reverse Voltage=5V, Test Current=20mA, Case/Package=0603, Depth=1.6mm, Dominant Wavelength=605nm, Height=0.8mm, Illumination Color=Orange, Lead Free="Lead Free", Length=3.2mm, Lens Style=Diffused, Lens Transparency=Clear, Luminous Intensity=90mcd, Mount="Surface Mount", Number of Elements=1, Number of LEDs=1, Number of Pins=2, Packaging="Tape and Reel", Power Rating=75mW, Radiation Hardening=No, Viewing Angle=130°, Wavelength=611nm, Width=0.8mm
DS7 PWR1: library part CMP-1744-00003-1, "LED Uni-Color Yellow, 65 mW, 20 mA, -40 to 85 degC, 2-Pin SMD, RoHS, Tape and Reel", Case Code (Imperial)=0603, Case Code (Metric)=1608, Max Operating Temperature="155 degC", Min Operating Temperature="-55 degC", Package Quantity=5000, Power Rating="100 mW", Resistance="390 Ohm", Tolerance=1%, Voltage Rating="50 V", Case\Package=0603, ComponentLink1Description="Manufacturer URL", ComponentLink1URL=http://www.avagotech.com/, ComponentLink2Description=Datasheet, ComponentLink2URL=http://docs.avagotech.com/docs/AV02-0551EN, ComponentLink3Description="Package Specification", ComponentLink3URL=http://www.fairchildsemi.com/dwg/MA/MA03D.pdf, DatasheetVersion=Mar-12, Height="0.45 mm", Length="1.6 mm", Mount="Surface Mount", PackageDescription="2-Pin Surface Mount Device, Body 1.6 x 0.8 mm, Height 0.9 mm", PackageReference=HSMX-C190, Packaging="Tape and Reel", Pins=2, REACH SVHC="No SVHC", RoHSCompliant=true, Voltage Rating (DC)="50 V", Width="0.8 mm"
F1: library part CMP-0257-00001-1, "Resettable PTC, 1812, 1.5 A Ihold, 3.0 A Itrip", ComponentLink1Description="Manufacturer URL", ComponentLink1URL=http://www.littelfuse.com/, ComponentLink2Description=Datasheet, ComponentLink2URL=http://www.littelfuse.com/products/resettable-ptcs/surface-mount/1812l/~/media/Electronics_Technical/Datasheets/Resettable_PTCs/Littelfuse_PTC_1812L_Datasheet.pdf, DatasheetVersion=6/2012, Ihold="1.5 A", Imax="100 A", Itrip="3 A", PackageDescription="2-Pin SMT Fuse, 4.55 x 3.24 mm Body", PackageReference=FUSE1812-71, PackageVersion=6/2012, PartNumber=1812L150ZR, Vmax="8 Vdc"
HDMIPORT: library part CMP-1502-00169-1, "HDMI Type A Receptacle WR-HDMI, Horizontal, SMT", Contact Resistance=30mOhm, Manufacturer="Wurth Elektronik", Operating Temperature=-20to85degC, Rated Current=0.5A, Working Voltage=40VDC, Connector Type=HDMITypeA, Datasheet URL=https://katalog.we-online.de/em/datasheet/685119134923.pdf, Gender=Receptacle, Manufacturer URL=http://www.we-online.de, Mounting Technology=SMT, Orientation=Horizontal, Package Reference=685119134923, Packaging=TapeandReel, Part Number=685119134923, Publisher=WurthElektronik
IC1: "Integrated Circuit", Manufacturer_Name=Microchip, Mouser Part Number=998-MIC5357-SGYMME, Arrow Part Number=MIC5357-SGYMME, Arrow Price/Stock=https://www.arrow.com/en/products/mic5357-sgymme/microchip-technology, Datasheet Link=http://ww1.microchip.com/downloads/en/DeviceDoc/mic5357.pdf, Height=1.04mm, Manufacturer_Part_Number=MIC5357-SGYMME, Mouser Price/Stock=https://www.mouser.com/Search/Refine.aspx?Keyword=998-MIC5357-SGYMME
IC2: library part CMP-07103-000004-1, "IC USB SWITCH DPDT 10MSOP", Case/Package=MSOP, Current=100mA, LCSC Part #=C11355, Max Operating Temperature=85°C, Max Supply Voltage=4.3V, Min Operating Temperature=-40°C, Min Supply Voltage=3V, On-State Resistance=6.5R, Package Quantity=1, Data Rate=480Mbps, Height=0.85mm, Lead Free="Lead Free", Length=3mm, Mount="Surface Mount", Number of Channels=2, Number of Inputs=2, Number of Outputs=4, Number of Pins=10, Operating Supply Voltage=4.3V, Packaging="Tape and Reel", Radiation Hardening=No, REACH SVHC="No SVHC", Supply Type=Single, Throw Configuration=DPDT, Voltage=4.3V, Weight=0.1125g, Width=3mm
J1: "Connector", Manufacturer_Name="TE Connectivity", Mouser Part Number=571-2040910-1, Arrow Part Number=2040910-1, Arrow Price/Stock=https://www.arrow.com/en/products/2040910-1/te-connectivity, Datasheet Link=https://www.arrow.com/en/products/2040910-1/te-connectivity, Height=15mm, Manufacturer_Part_Number=2040910-1, Mouser Price/Stock=https://www.mouser.co.uk/ProductDetail/TE-Connectivity/2040910-1?qs=kAqyOuzYGe9tF8FZbDgYRA%3D%3D
J2: library part CMP-1502-00176-1, "DC Power Jack Connector with Pegs WR-DC, Male, Right Angled, SMT, 5 A, 24 V", Manufacturer="Wurth Elektronik", Operating Temperature=-40to85degC, Rated Current=5A, Working Voltage=24V, Datasheet URL=http://katalog.we-online.de/em/datasheet/6941xx105102.pdf, Gender=Male, Manufacturer URL=http://www.we-online.de, Mounting Technology=SMT, Opening Diameter=6.4mm, Orientation=RightAngled, Package Reference=694106105102, Packaging=TapeandReel, Part Number=694106105102, Plug Inner Diameter=2.05mm, Plug Outer Diameter=5.5mm, Publisher=WurthElektronik
JTAG: library part CMP-1502-01528-1, "SMT ZIF Connectors WR-FPC, Horizontal, Bottom Contact, pitch 0.5 mm, 8 pins", Contact Resistance=20mOhm, Manufacturer="Wurth Elektronik", Operating Temperature=-25to85degC, Rated Current=0.5A, Withstanding Voltage=250VAC, Working Voltage=50VAC, Contact Design=BottomContact, Datasheet URL=https://katalog.we-online.de/em/datasheet/68710814522.pdf, Manufacturer URL=http://www.we-online.de, Mounting Technology=SMT, Orientation=Horizontal, Package Reference=68710814522, Packaging=TapeandReel, Part Number=68710814522, Pin Number=8, Pitch=0.5mm, Publisher=WurthElektronik
P1 P2 P3 P4: library part CMP-2000-05661-1, "Male Header, Pitch 2.54 mm, 1 x 6 Position, Height 10.03 mm, Tail Length 3.56 mm, -55 to 105 degC, Bulk", Color=White, Current, Rating="5 /  / A", Flammability Rating=UL94V-0, Manufacturer="TE Connectivity", Package Description="Male Header, Pitch 2.54 mm, 1 x 6 Position, Height 10.03 mm, Tail Length 3.56 mm", Temperature, Operating="-55to+105 /  / °C", Voltage, Rating="250 /  / V", Agency Approvals=CSA,UL, Angle=Straight, Brand/Series=MTA-100Series, Color, Housing=White, Connector Type=MTA-100, Contact Centerline Spacing="0.100 /  / in.", Contact Mating Area Plating=Tin, Contact Plating=Tin, Contact Shape=Square, Contact Termination Area Plating=Tin, Datasheet URL=https://datasheet.ciiva.com/25618/0900766b80eb7fdd-25618163.pdf, Datasheet Version="Rev. W, 05/2005", Length, Overall="0.6 /  / \"", Length, Pin="0.14 /  / \"", Length, Terminal Post="0.14 /  / in.", Manufacturer URL=http://www.te.com/, Material, Contact=CopperAlloy, Material, Housing=Polyester, Mount Angle=Vertical, Mounting Hole Size="0.04 /  / \"", Mounting Technology=ThroughHole, Mounting Type=PCMount, Number of Contacts=6, Number of Positions=6, Number of Rows=1, Package Reference=640456-6, Pin Spacing="0.1 /  / \"", Primary Type=InterconnectSystem, Size, Post="0.025 /  / in.", Special Features=Pinstrip, Standards=RoHSCompliant,ELVCompliant,UL94V-0, Termination=Solder, Type=PCBPlug
Q1 Q2 Q3 Q4 Q5: library part CMP-2000-07450-1, "N-Channel Enhancement Mode MOSFET, 20 V, 630 mA, -55 to 150 degC, 3-Pin SOT23, RoHS, Tape and Reel", Case\/Package=SOT-523, Continuous Drain Current (ID)=630mA, Drain to Source Breakdown Voltage=20V, Drain to Source Resistance=300mOhm, Gate to Source Voltage (Vgs)=6V, Input Capacitance=60.67pF, LCSC Part #=C20512, Manufacturer="Diodes Inc", Max Operating Temperature=150degC, Max Power Dissipation=280mW, Min Operating Temperature=-55degC, On-State Resistance=400MOhm, Package Description="3-Pin Small Outline Transistor, Body 1.6 x 0.8 mm, Pitch 0.5 mm", Package Quantity=3000, Package Reference=SOT523-3, Threshold Voltage=1V, Contact Plating=Matte, Datasheet URL=https://www.diodes.com/assets/Datasheets/ds31783.pdf, Datasheet Version="Rev. 3-2, 01/2012", Drain to Source Voltage (Vdss)=20V, Element Configuration=Single, Fall Time=12.3ns, Height=0.8mm, Lead Free=LeadFree, Length=1.7mm, Manufacturer URL=http://www.diodes.com/, Mount=SurfaceMount, Mounting Technology=SurfaceMount, Number of Channels=1, Number of Elements=1, Number of Pins=3, Packaging=TapeandReel, Power Dissipation=280mW, Radiation Hardening=No, Rds On Max=400mOhm, REACH SVHC=NoSVHC, Rise Time=7.4ns, RoHSCompliant=true, Turn-Off Delay Time=26.7ns, Turn-On Delay Time=5.1ns, Weight=7.1E-05oz, Width=0.85mm
R1 R2 R3 R4 R5 R6 R7: library part Res1, "Resistor", LatestRevisionDate=17-Jul-2002, LatestRevisionNote="Re-released for DXP Platform.", PackageDescription="Axial Device, Thru-Hole; 2 Leads; 0.3 in Pin Spacing", PackageReference=AXIAL-0.3, Published=8-Jun-2000, Publisher="Altium Limited"
R10 R12 R13 R14 R15 R16 R19 R25 R26 R27: library part CMP-2002-07344-1, Manufacturer="Yageo / Phycomp", Part Number=RC0402FR-07100RL, spec=100R
R11: library part CMP-02407-001195-1, "RES SMD 10K OHM 1% 1/16W 0402", Case Code (Imperial)=0402, Case Code (Metric)=1005, Max Operating Temperature=155°C, Max Power Dissipation=63mW, Min Operating Temperature=-55°C, Package Quantity=10, Resistance=10kR, Temperature Coefficient=100ppm/°C, Tolerance=1%, Voltage Rating=50V, Case/Package=0402, Composition="Thick Film", Contact Plating=Tin, Depth=0.5mm, Features="Automotive AEC-Q200", Height=0.35mm, Lead Free="Lead Free", Length=1mm, Military Standard=Not, Mount="Surface Mount", Number of Pins=2, Number of Terminations=2, Packaging="Tape and Reel", Power Rating=63mW, Radiation Hardening=No, Termination=SMD/SMT, Voltage Rating (DC)=50V, Weight=2.3E-05oz, Width=0.02inch
R17 R21 R22: library part Res1, "Resistor", LCSC Part #=C25792, LatestRevisionDate=17-Jul-2002, LatestRevisionNote="Re-released for DXP Platform.", PackageDescription="Axial Device, Thru-Hole; 2 Leads; 0.3 in Pin Spacing", PackageReference=AXIAL-0.3, Published=8-Jun-2000, Publisher="Altium Limited"
R18: library part Res1, "Resistor", LCSC Part #=C17900, LatestRevisionDate=17-Jul-2002, LatestRevisionNote="Re-released for DXP Platform.", PackageDescription="Axial Device, Thru-Hole; 2 Leads; 0.3 in Pin Spacing", PackageReference=AXIAL-0.3, Published=8-Jun-2000, Publisher="Altium Limited"
R20: library part Res1, "Resistor", LCSC Part #=C21189, LatestRevisionDate=17-Jul-2002, LatestRevisionNote="Re-released for DXP Platform.", PackageDescription="Axial Device, Thru-Hole; 2 Leads; 0.3 in Pin Spacing", PackageReference=AXIAL-0.3, Published=8-Jun-2000, Publisher="Altium Limited"
R23 R24: library part Res1, "Resistor", LCSC Part #=C21190, LatestRevisionDate=17-Jul-2002, LatestRevisionNote="Re-released for DXP Platform.", PackageDescription="Axial Device, Thru-Hole; 2 Leads; 0.3 in Pin Spacing", PackageReference=AXIAL-0.3, Published=8-Jun-2000, Publisher="Altium Limited"
SJ1: library part CMP-2000-03816-1, Manufacturer="Vishay Dale", Part Number=CRCW06030000Z0EA
SW1: library part CMP-2000-05602-1, "Tactile Switch, 50 mA, 12 VDC, -20 to 85 degC, 4-Pin SMD, RoHS, Bulk", Actuator Color=N/A, Contact Rating @ Voltage=0.05@12VDCA, Dielectric Strength=500VAC, Manufacturer=TEConnectivity/AMPBrand, Maximum Contact Resistance=100mOhm, Maximum DC Voltage Rating=12V, Minimum Insulation Resistance=100MOhm, Operating Force=1.57N, Operating Temperature=-20to85C, Package Description="4-Pin Surface Mount Device, Body 6 x 6 mm, Pitch 9.1 mm", Actuator Length=1.4mm, Actuator Style=RoundButton, Base Material=N/A, Body Orientation=Straight, Contact Material=CopperAlloy, Contact Plating=Silver, Datasheet URL=https://datasheet.ciiva.com/14635/0900766b80912216-14635826.pdf, Datasheet Version=04/2007, Dimension=6x10x5.25mm, Electrical Life=100000Cycle, Family=FSMJSMA, Ground Terminal=No, Housing Material=N/A, Illumination Type=N/R, Manufacturer URL=http://www.te.com/, Maximum AC Voltage Rating=N/A, Mechanical Life=N/A, Mounting=SurfaceMount,GullWing, Mounting Technology=SurfaceMount, Package Reference=4-1437565-1, Packaging=Bulk, Part No=4-1437565-1, Pole Throw Configuration=N/A, Product Weight=N/A, RoHS=Yes, Seal Description=N/A, Seal Location=N/A, Switch Configuration=N/A, Type=N/A
TP1 TP2 TP3 TP4 TP5 TP6 TP7 TP8 TP9 TP10: library part CMP-2000-05575-2, "PC TEST POINT MINIATURE YELLOW", Manufacturer=Keystone, Automotive=No, Category=Conn, ComponentLink2Description=Datasheet, ComponentLink2URL=https://www.keyelco.com/product-pdf.cfm?p=1313, Contact Material=Silver, Device Class L1=Connectors, Device Class L2=unset, Device Class L3=unset, Digikey Description="PC TEST POINT MINIATURE YELLOW", Height=4.72mm, Is Female=yes, Lead Free=Yes, Manufacturer Part Number=5004, Mouser Description="TEST POINT PC MINI .040\"D YELLOW", Number of Contacts=1, Octopart=https://octopart.com/5004-keystone-28591, Package=5004, RoHS=TRUE
U1: library part CMP-0209-00147-1, "FastFLASH XC900XL, 3.3V High-Performance 144 Macrocell CPLD, 81 User I/Os, 100-Pin TQFP, Speed Grade 10, Commercial Grade, Pb-Free", DatasheetVersion="ver2.0, Apr-2007", PackageDescription="100-Pin Thin Quad Flat Pack (TQG100) - Pb-Free", PackageReference=TQG100, PackageVersion="ver1.2, Jun-2004"
U2 U3 U4 U7 U8 U9: library part CMP-1061-00155-1, "5-Line Transient Voltage Suppressor Array, 6-Pin SC70, Pb-Free, Tape and Reel", Manufacturer="On Semiconductor", ComponentLink1Description="Manufacturer URL", ComponentLink1URL=http://www.onsemi.com/, ComponentLink2Description=Datasheet, ComponentLink2URL=http://www.onsemi.com/pub_link/Collateral/SMF05C-D.PDF, ComponentLink3Description="Package Specification", ComponentLink3URL=http://www.onsemi.com/pub_link/Collateral/SMF05C-D.PDF, DatasheetVersion="Rev. 4", Direction=Unidirectional, IR Max (uA)=5, Mounting Technology="Surface Mount", PackageDescription="6-Pin Small Outline Transistor, Body 2 x 1.25 mm, Pitch 0.65 mm", PackageReference=SC70-6-419B-02_W, PackageVersion="Rev. W", Packing="Tape and Reel", PartNumber=SMF05CT1G, PPK Max (W)=100, RoHS=Pb-Free
U5: library part CMP-07200-000007-1, "TVS DIODE 3V 9WLCSP", Capacitance=29pF, Max Operating Temperature=85°C, Max Reverse Leakage Current=200nA, Min Breakdown Voltage=6V, Min Operating Temperature=-30°C, Package Quantity=5000, Power Line Protection=No, Reverse Standoff Voltage=3V, Composition=Zener, Depth=1.14mm, Direction=Unidirectional, ESD Protection=Yes, Halogen Free="Halogen Free", Height=0.63mm, Lead Free="Lead Free", Length=1.14mm, Number of Lines=5, Number of Pins=9, Number of Unidirectional Channels=5, Packaging="Tape and Reel", Radiation Hardening=No, Width=1.14mm
U6: library part CMP-12752-000002-1, "LOAD SWITCH SC59", Case/Package=TO-236-3, Current=200mA, Max Operating Temperature=85°C, Max Supply Voltage=5.2V, Min Operating Temperature=-40°C, Min Supply Voltage=2.7V, On-State Resistance=350mR, Package Quantity=3000, Fault Protection="Over Temperature", Height=1.3mm, Interface=On/Off, Length=3.1mm, Max Output Current=200mA, Mount="Surface Mount", Number of Outputs=1, Number of Pins=59, Output Configuration="High Side", Output Current=200mA, Packaging="Tape and Reel", Radiation Hardening=No, REACH SVHC="No SVHC", Turn-On Delay Time=700us, Voltage=5.2V, Width=1.7mm
USBA: library part CMP-1502-03227-1, "USB 2.0 Type A Receptacle WR-COM, Horizontal, THT", Contact Resistance=20mOhm, Manufacturer="Wurth Elektronik", Operating Temperature=-40to105degC, Rated Current=1.5A, Working Voltage=30VAC, Connector Type=USB2.0TypeA, Datasheet URL=https://katalog.we-online.de/em/datasheet/61400416021.pdf, Gender=Receptacle, Manufacturer URL=http://www.we-online.de, Mounting Technology=THT, Orientation=Horizontal, Package Reference=61400416021, Packaging=Tray, Part Number=61400416021, Publisher=WurthElektronik
USBB: library part CMP-1698-00007-1, "Micro USB 2.0 B Receptacle, -55 to 85 degC, 5-Pin SMD, RoHS, Tape and Reel", Case Code (Imperial)=0603, Case Code (Metric)=1608, Max Operating Temperature="155 degC", Min Operating Temperature="-55 degC", Package Quantity=5000, Power Rating="100 mW", Resistance="4.7 kohm", Tolerance=1%, Type (Resistor)="Thick Film", Voltage Rating="75 V", Case\Package=0603, ComponentLink1Description="Manufacturer URL", ComponentLink1URL=http://portal.fciconnect.com/, ComponentLink2Description=Datasheet, ComponentLink2URL=http://portal.fciconnect.com/Comergent//fci/drawing/10103594.pdf, DatasheetVersion="Rev. A, 06/2010", Height="0.45 mm", Length="1.55 mm", Mount="Surface Mount", PackageDescription="5-Pin Surface Mount Device, Body 8.04 x 5.62 mm", PackageReference=FCI-10103594-0001LF, Packaging="Tape and Reel", Pins=2, REACH SVHC=Unknown, RoHSCompliant=true, Weight="7.1E-05 oz", Width="0.85 mm"
USBBOOT: "Header, 3-Pin", LatestRevisionDate=17-Jul-2002, LatestRevisionNote="Re-released for DXP Platform.", Publisher="Altium Limited"
X1: library part CMP-0269-00001-1, "OSC, 50.000 MHZ, ± 25 ppm, 3.3 V, SMT / OCETDLJTNF-50MHZ", Frequency Stability="Â± 25 ppm(-10 to +70 degC)", Operating Temperature Range="-40 to 85 degC", PartNumber=7W-50.000MBA-T, Storage Temperature="-50 to 125 degC", Body Shape="Rectangular, 4 SMD", ComponentLink1Description="Manufacturer URL", ComponentLink1URL=http://www.txccrystal.com/, ComponentLink2Description=Datasheet, ComponentLink2URL=http://www.txccrystal.com/images/pdf/7w-tight.pdf, Mounting Technology="Surface Mount", PackageDescription="4-Pin SMT LED, 7 x 5 mm Body", PackageReference=L500W700H130-4, Rise/Fall Time="7 ns"

## Via types
v1: diameter 20, hole 10, Top Layer to Bottom Layer, 215 vias
v2: diameter 40, hole 30, Top Layer to Bottom Layer, 3 vias

## Nets (pads, with @x,y where several pads share a name; then routed paths per layer and width w, separated by ;. In a path a pad name is that pad's centre, name@x,y a point inside that pad or via, vN(x,y) a via of type N, cw(c..) or ccw(c..) an arc to the next point about the centre after c; other vN are vias at no path point)
1.8V: C3.2 C15.2 C16.1 C17.1 C18.1 C19.1 IC1.7 J1.183 J1.184 J1.185 J1.186 R18.2 R23.2 TP2.1 TP8.1 | length 1470.9
  Top Layer w10: C3.2@1174.69,475 C3.2@1179.09,479.41 ; C19.1@2041.02,765 2041.02,770.31 C19.1@2052.17,781.46 ; 2537.64,769.65 2541.89,765.39 ; C15.2@2541.89,845 2541.89,876.89 2550,885 2730,885 2805,810 TP8.1@2805,725
  Top Layer w15: C3.2@1179.09,479.41 IC1.7@1251.77,479.41
  Top Layer w20: TP2.1@1015,295 1100,295 1174.69,369.69 C3.2@1174.69,475
  Top Layer w25: C19.1@2052.17,781.46 2175.16,781.46 2343.54,781.46 2360,765 2430.35,765 2435,769.65 2537.64,769.65 ; C18.1@2541.1,685 2541.89,685.79 2541.89,740 2541.89,765.39 2541.89,790 C15.2@2541.89,845
3.3V: C4.2 C10.2 C11.1 C12.1 C13.1 C14.1 C20.2 C21.2 C22.2 C23.2 C24.2 C25.2 C26.2 C28.2 C29.2 IC1.4 IC1.8 IC2.1 J1.39 J1.40 J1.41 J1.42 J1.189 J1.190 J1.191 J1.192 J1.193 J1.194 R5.1 R6.1 R7.1 R16.2 R21.1 R24.2 TP3.1 TP9.1 U1.5 U1.26 U1.38 U1.51 U1.57 U1.88 U1.98 X1.1 X1.4 | length 1201.5
  Top Layer w10: U1.5@1402.48,2546.26 1402.48,2607.48 1415,2620 C20.2@1460.31,2620 ; J1.42@2435,2458.62 J1.42@2436.38,2460
  Top Layer w20: R7.1@1250,249.68 IC1.8@1250,447.68 ; C12.1@2012.32,635 2014.53,637.2 2032.2,637.2 2090.67,695.67 J1.192@2172.05,695.67 ; J1.194@2175.16,680.58 J1.192@2175.16,698.78 J1.190@2175.16,718.26 ; J1.193@2435,670 J1.191@2435,686.97 J1.189@2435,705.65
  Top Layer w25: C4.2@1384.69,630 1430,584.69 ; TP3.1@1430,830 1430,584.69 ; IC1.4@1430.05,534.35 1430,534.4 1430,584.69 ; J1.192@2178.94,695 2318.94,695 2326.97,686.97 J1.191@2435,686.97
3V3: R11.2 R19.2 TP7.1
5V: C1.2 C5.2 C6.1 C7.1 C8.1 C9.1 C32.1 F1.2 IC1.1 IC1.5 J1.197 J1.198 J1.199 J1.200 R20.2 TP1.1 TP10.1 U6.3 | length 1591
  Top Layer w10: C9.1@1995,484.02 1998.94,484.02 2038.23,523.31 C9.1@2038.23,527.24 ; J1.199@2435,592.48 2435,604.29
  Top Layer w20: J1.200@2175.16,604.29 J1.198@2175.16,624.58
  Top Layer w25: F1.2@1042.91,500 1045,502.09 F1.2@1045,529.06 ; TP1.1@1045,725 F1.2@1045,529.06 ; C1.2@1250,585.31 1250,540 1240,550 1084.86,550 1084.37,549.51 1065.45,549.51 F1.2@1045,529.06 ; C7.1@1982.32,565 1982.32,496.69 C9.1@1995,484.02 ; C9.1@2038.23,527.24 2115.28,604.29 J1.200@2175.16,604.29 2435,604.29 ; 2435,585 2435,565 2450,550 C6.1@2541.1,550 ; C5.2@2541.89,605 2541.89,495.79 C8.1@2541.1,495 2541.1,378.9 TP10.1@2635,285
ADC_EN: J1.47 U1.94 | length 647.3
  Top Layer w10: U1.94@1541.26,2368.11 1583.11,2368.11 1615,2400 2174.72,2400 J1.47@2175.16,2399.57
CEC: HDMIPORT.13 Q4.2 U5.A2 | length 543.8
  Top Layer w10: HDMIPORT.13@565.16,1354.57 HDMIPORT.13@564.64,1354.06 654.06,1354.06 v1(655,1355) 749.58,1355 749.67,1354.91 780,1385.25 U5.A2@780,1394.25 ; v1(665.21,1577.71) 665.21,1585.21 670.31,1590.31 Q4.2@734.41,1590.31
  Bottom Layer w10: v1(655,1355) 655,1356.35 665,1366.35 665,1577.5 v1(665.21,1577.71)
COMMS_EN: J1.59 U1.89 | length 639.1
  Top Layer w10: U1.89@1541.26,2269.68 1566.69,2269.68 1567.01,2270 2030,2270 2042.17,2257.83 J1.59@2175.16,2257.83
CS: J1.58 U1.86 | length 918.7
  Top Layer w10: U1.86@1541.26,2210.63 1566.69,2210.63 1567.32,2210 v1(1945,2210) ; v1(2300,2250) 2319.65,2269.65 J1.58@2435,2269.65
  Bottom Layer w10: v1(1945,2210) 1950,2210 1985,2245 2292.29,2245 2297.29,2250 v1(2300,2250)
CS2: P2.4 U1.32 U3.5 | length 1210.1
  Top Layer w10: P2.4@210,2720 380,2720 ; v1(430,2720) 380,2720 ; v1(558.41,2849.78) 570,2861.37 U3.5@570,2937.6 ; U1.32@948.74,2368.11 731.89,2368.11 380,2720
  Bottom Layer w10: v1(430,2720) 558.41,2848.41 v1(558.41,2849.78)